# EAGLE board 10_ARDUINO_Front (EAGLE 7.6.0)
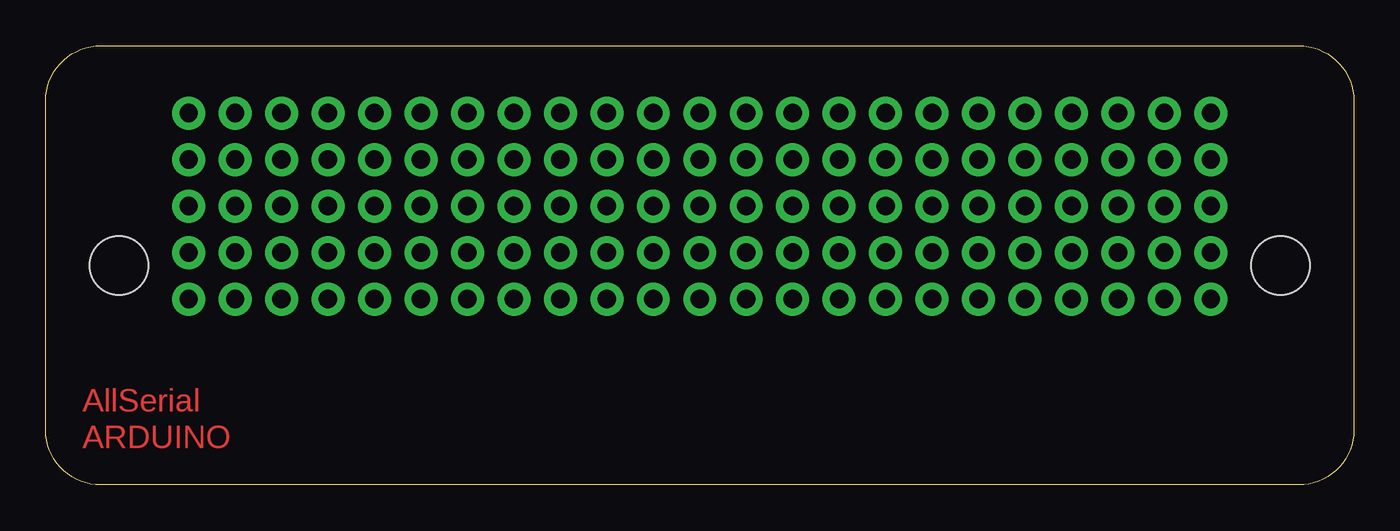
[diagram p0: board, top side]
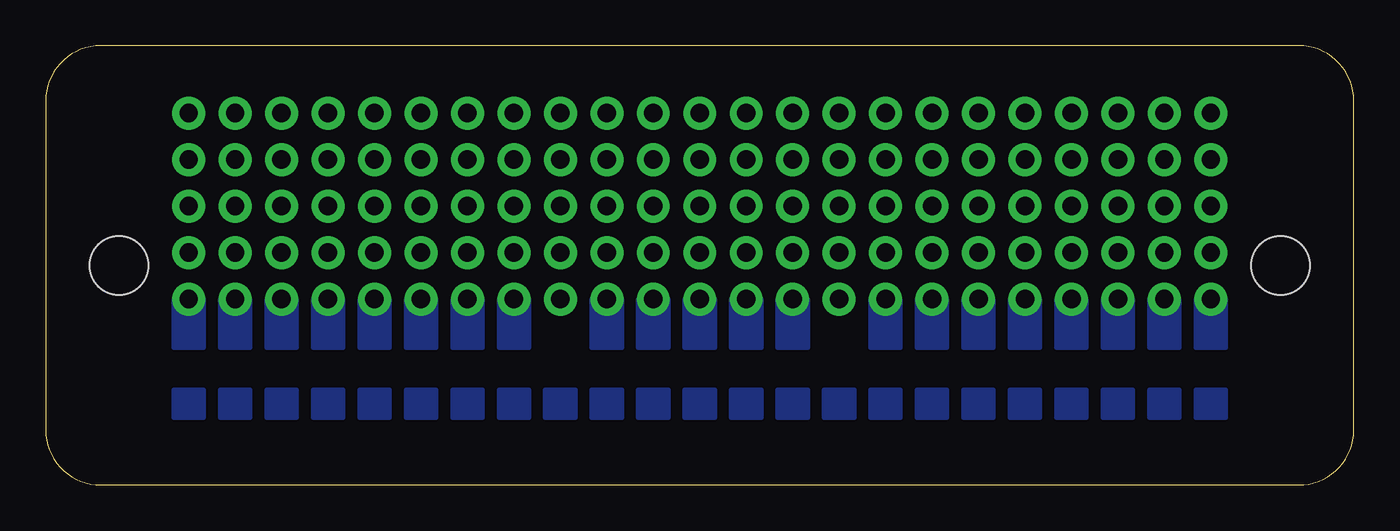
[diagram p1: board, bottom side, seen from below]

Size 71.5 x 24 mm. Coordinates in mm from the lower left corner, seen from the top.
Copper layers (1*16): Top 0.035mm / dielectric 1.5mm / Bottom 0.035mm
Design rules "default *": minimum track width 10mil, minimum drill 0.3mm, track to track 8mil, track to pad 8mil, pad to pad 8mil, via to via 8mil, smd to smd 8mil, copper to edge 0.2mm, drill to drill 8mil, minimum pad ring 10mil, minimum via ring 8mil, stop-mask expansion 4mil, vias tented up to drill 0mil, thermal gap 10mil

## Footprints (pad centres in the part's own frame; a part is rotated, then mirrored left to right if it is on the bottom)
PANEL = hole 3.2: -31.75,12; 31.75,12

## Placement (x,y rotation side)
E$1  [PANEL]  35.75,0 0 top

## Library data of the parts
E$1 = AllSerialv2

## Tracks (layer width: path | path; a pad name or v marks a point on that pad's centre or on a via)
S$1  (via drill 1 pad 1.8)
  other vias: 35.75,10.16
  pour Bottom: 34.93,7.49 34.93,10.16 36.57,10.16 36.57,7.49
S$2  (via drill 1 pad 1.8)
  other vias: 35.75,12.7
S$3  (via drill 1 pad 1.8)
  other vias: 35.75,15.24
S$4  (via drill 1 pad 1.8)
  other vias: 35.75,17.78
S$5  (via drill 1 pad 1.8)
  other vias: 35.75,20.32
S$6  (via drill 1 pad 1.8)
  other vias: 38.29,20.32
S$7  (via drill 1 pad 1.8)
  other vias: 38.29,17.78
S$8  (via drill 1 pad 1.8)
  other vias: 38.29,15.24
S$9  (via drill 1 pad 1.8)
  other vias: 38.29,12.7
S$10
  pour Bottom: 34.93,3.68 34.93,5.21 36.57,5.21 36.57,3.68
S$11  (via drill 1 pad 1.8)
  other vias: 33.21,10.16
  pour Bottom: 32.39,7.49 32.39,10.16 34.03,10.16 34.03,7.49
S$12  (via drill 1 pad 1.8)
  other vias: 33.21,12.7
S$13  (via drill 1 pad 1.8)
  other vias: 33.21,15.24
S$14  (via drill 1 pad 1.8)
  other vias: 33.21,17.78
S$15  (via drill 1 pad 1.8)
  other vias: 33.21,20.32
S$16
  pour Bottom: 32.39,3.68 32.39,5.21 34.03,5.21 34.03,3.68
S$17  (via drill 1 pad 1.8)
  other vias: 43.37,12.7
S$18  (via drill 1 pad 1.8)
  other vias: 43.37,15.24
S$19  (via drill 1 pad 1.8)
  other vias: 43.37,17.78
S$20  (via drill 1 pad 1.8)
  other vias: 43.37,20.32
S$21  (via drill 1 pad 1.8)
  other vias: 45.91,20.32
S$22  (via drill 1 pad 1.8)
  other vias: 45.91,17.78
S$23  (via drill 1 pad 1.8)
  other vias: 45.91,15.24
S$24  (via drill 1 pad 1.8)
  other vias: 45.91,12.7
S$25  (via drill 1 pad 1.8)
  other vias: 45.91,10.16
  pour Bottom: 45.09,7.49 45.09,10.16 46.73,10.16 46.73,7.49
S$26  (via drill 1 pad 1.8)
  other vias: 30.67,10.16
  pour Bottom: 29.85,7.49 29.85,10.16 31.49,10.16 31.49,7.49
S$27  (via drill 1 pad 1.8)
  other vias: 40.83,12.7
S$28  (via drill 1 pad 1.8)
  other vias: 40.83,15.24
S$29  (via drill 1 pad 1.8)
  other vias: 40.83,17.78
S$30  (via drill 1 pad 1.8)
  other vias: 40.83,20.32
S$31  (via drill 1 pad 1.8)
  other vias: 48.45,10.16
  pour Bottom: 47.63,7.49 47.63,10.16 49.27,10.16 49.27,7.49
S$32  (via drill 1 pad 1.8)
  other vias: 50.99,12.7
S$33  (via drill 1 pad 1.8)
  other vias: 50.99,15.24
S$34  (via drill 1 pad 1.8)
  other vias: 50.99,17.78
S$35  (via drill 1 pad 1.8)
  other vias: 50.99,20.32
S$36  (via drill 1 pad 1.8)
  other vias: 53.53,20.32
S$37  (via drill 1 pad 1.8)
  other vias: 53.53,17.78
S$38  (via drill 1 pad 1.8)
  other vias: 53.53,15.24
S$39  (via drill 1 pad 1.8)
  other vias: 53.53,12.7
S$40  (via drill 1 pad 1.8)
  other vias: 50.99,10.16
  pour Bottom: 50.17,7.49 50.17,10.16 51.81,10.16 51.81,7.49
S$41  (via drill 1 pad 1.8)
  other vias: 53.53,10.16
  pour Bottom: 52.71,7.49 52.71,10.16 54.35,10.16 54.35,7.49
S$42  (via drill 1 pad 1.8)
  other vias: 48.45,12.7
S$43  (via drill 1 pad 1.8)
  other vias: 48.45,15.24
S$44  (via drill 1 pad 1.8)
  other vias: 48.45,17.78
S$45  (via drill 1 pad 1.8)
  other vias: 48.45,20.32
S$46
  pour Bottom: 29.85,3.68 29.85,5.21 31.49,5.21 31.49,3.68
S$47  (via drill 1 pad 1.8)
  other vias: 30.67,12.7
S$48  (via drill 1 pad 1.8)
  other vias: 30.67,15.24
S$49  (via drill 1 pad 1.8)
  other vias: 30.67,17.78
S$50  (via drill 1 pad 1.8)
  other vias: 30.67,20.32
S$51  (via drill 1 pad 1.8)
  other vias: 38.29,10.16
  pour Bottom: 37.47,7.49 37.47,10.16 39.11,10.16 39.11,7.49
S$52  (via drill 1 pad 1.8)
  other vias: 28.13,12.7
S$53  (via drill 1 pad 1.8)
  other vias: 28.13,15.24
S$54  (via drill 1 pad 1.8)
  other vias: 28.13,17.78
S$55  (via drill 1 pad 1.8)
  other vias: 28.13,20.32
S$56  (via drill 1 pad 1.8)
  other vias: 17.97,20.32
S$57  (via drill 1 pad 1.8)
  other vias: 17.97,17.78
S$58  (via drill 1 pad 1.8)
  other vias: 17.97,15.24
S$59  (via drill 1 pad 1.8)
  other vias: 17.97,12.7
S$60  (via drill 1 pad 1.8)
  other vias: 17.97,10.16
  pour Bottom: 17.15,7.49 17.15,10.16 18.79,10.16 18.79,7.49
S$61  (via drill 1 pad 1.8)
  other vias: 23.05,12.7
S$62  (via drill 1 pad 1.8)
  other vias: 23.05,15.24
S$63  (via drill 1 pad 1.8)
  other vias: 23.05,17.78
S$64  (via drill 1 pad 1.8)
  other vias: 23.05,20.32
S$65  (via drill 1 pad 1.8)
  other vias: 25.59,20.32
S$66  (via drill 1 pad 1.8)
  other vias: 25.59,17.78
S$67  (via drill 1 pad 1.8)
  other vias: 25.59,15.24
S$68  (via drill 1 pad 1.8)
  other vias: 25.59,12.7
S$69  (via drill 1 pad 1.8)
  other vias: 20.51,12.7
S$70  (via drill 1 pad 1.8)
  other vias: 20.51,15.24
S$71  (via drill 1 pad 1.8)
  other vias: 20.51,17.78
S$72  (via drill 1 pad 1.8)
  other vias: 20.51,20.32
S$73  (via drill 1 pad 1.8)
  other vias: 20.51,10.16
  pour Bottom: 19.69,7.49 19.69,10.16 21.33,10.16 21.33,7.49
S$74  (via drill 1 pad 1.8)
  other vias: 23.05,10.16
  pour Bottom: 22.23,7.49 22.23,10.16 23.87,10.16 23.87,7.49
S$75  (via drill 1 pad 1.8)
  other vias: 25.59,10.16
  pour Bottom: 24.77,7.49 24.77,10.16 26.41,10.16 26.41,7.49
S$76  (via drill 1 pad 1.8)
  other vias: 56.07,20.32
S$77  (via drill 1 pad 1.8)
  other vias: 56.07,17.78
S$78  (via drill 1 pad 1.8)
  other vias: 56.07,15.24
S$79  (via drill 1 pad 1.8)
  other vias: 56.07,12.7
S$80  (via drill 1 pad 1.8)
  other vias: 56.07,10.16
  pour Bottom: 55.25,7.49 55.25,10.16 56.89,10.16 56.89,7.49
S$81  (via drill 1 pad 1.8)
  other vias: 61.15,12.7
S$82  (via drill 1 pad 1.8)
  other vias: 61.15,15.24
S$83  (via drill 1 pad 1.8)
  other vias: 61.15,17.78
S$84  (via drill 1 pad 1.8)
  other vias: 61.15,20.32
S$85  (via drill 1 pad 1.8)
  other vias: 63.69,20.32
S$86  (via drill 1 pad 1.8)
  other vias: 63.69,17.78
S$87  (via drill 1 pad 1.8)
  other vias: 63.69,15.24
S$88  (via drill 1 pad 1.8)
  other vias: 63.69,12.7
S$89  (via drill 1 pad 1.8)
  other vias: 58.61,12.7
S$90  (via drill 1 pad 1.8)
  other vias: 58.61,15.24
S$91  (via drill 1 pad 1.8)
  other vias: 58.61,17.78
S$92  (via drill 1 pad 1.8)
  other vias: 58.61,20.32
S$93  (via drill 1 pad 1.8)
  other vias: 58.61,10.16
  pour Bottom: 57.79,7.49 57.79,10.16 59.43,10.16 59.43,7.49
S$94  (via drill 1 pad 1.8)
  other vias: 61.15,10.16
  pour Bottom: 60.33,7.49 60.33,10.16 61.97,10.16 61.97,7.49
S$95  (via drill 1 pad 1.8)
  other vias: 63.69,10.16
  pour Bottom: 62.87,7.49 62.87,10.16 64.51,10.16 64.51,7.49
S$96  (via drill 1 pad 1.8)
  other vias: 7.81,20.32
S$97  (via drill 1 pad 1.8)
  other vias: 7.81,17.78
S$98  (via drill 1 pad 1.8)
  other vias: 7.81,15.24
S$99  (via drill 1 pad 1.8)
  other vias: 7.81,12.7
S$100  (via drill 1 pad 1.8)
  other vias: 7.81,10.16
  pour Bottom: 6.99,7.49 6.99,10.16 8.63,10.16 8.63,7.49
S$101  (via drill 1 pad 1.8)
  other vias: 12.89,12.7
S$102  (via drill 1 pad 1.8)
  other vias: 12.89,15.24
S$103  (via drill 1 pad 1.8)
  other vias: 12.89,17.78
S$104  (via drill 1 pad 1.8)
  other vias: 12.89,20.32
S$105  (via drill 1 pad 1.8)
  other vias: 15.43,20.32
S$106  (via drill 1 pad 1.8)
  other vias: 15.43,17.78
S$107  (via drill 1 pad 1.8)
  other vias: 15.43,15.24
S$108  (via drill 1 pad 1.8)
  other vias: 15.43,12.7
S$109  (via drill 1 pad 1.8)
  other vias: 10.35,12.7
S$110  (via drill 1 pad 1.8)
  other vias: 10.35,15.24
S$111  (via drill 1 pad 1.8)
  other vias: 10.35,17.78
S$112  (via drill 1 pad 1.8)
  other vias: 10.35,20.32
S$113  (via drill 1 pad 1.8)
  other vias: 10.35,10.16
  pour Bottom: 9.53,7.49 9.53,10.16 11.17,10.16 11.17,7.49
S$114  (via drill 1 pad 1.8)
  other vias: 12.89,10.16
  pour Bottom: 12.07,7.49 12.07,10.16 13.71,10.16 13.71,7.49
S$115  (via drill 1 pad 1.8)
  other vias: 15.43,10.16
  pour Bottom: 14.61,7.49 14.61,10.16 16.25,10.16 16.25,7.49
S$116
  pour Bottom: 24.77,3.68 24.77,5.21 26.41,5.21 26.41,3.68
S$117
  pour Bottom: 22.23,3.68 22.23,5.21 23.87,5.21 23.87,3.68
S$118
  pour Bottom: 19.69,3.68 19.69,5.21 21.33,5.21 21.33,3.68
S$119
  pour Bottom: 17.15,3.68 17.15,5.21 18.79,5.21 18.79,3.68
S$120
  pour Bottom: 14.61,3.68 14.61,5.21 16.25,5.21 16.25,3.68
S$121
  pour Bottom: 12.07,3.68 12.07,5.21 13.71,5.21 13.71,3.68
S$122
  pour Bottom: 9.53,3.68 9.53,5.21 11.17,5.21 11.17,3.68
S$123
  pour Bottom: 6.99,3.68 6.99,5.21 8.63,5.21 8.63,3.68
S$124
  pour Bottom: 47.63,3.68 47.63,5.21 49.27,5.21 49.27,3.68
S$125
  pour Bottom: 45.09,3.68 45.09,5.21 46.73,5.21 46.73,3.68
S$126
  pour Bottom: 52.71,3.68 52.71,5.21 54.35,5.21 54.35,3.68
S$127
  pour Bottom: 50.17,3.68 50.17,5.21 51.81,5.21 51.81,3.68
S$128
  pour Bottom: 57.79,3.68 57.79,5.21 59.43,5.21 59.43,3.68
S$129
  pour Bottom: 55.25,3.68 55.25,5.21 56.89,5.21 56.89,3.68
S$130
  pour Bottom: 62.87,3.68 62.87,5.21 64.51,5.21 64.51,3.68
S$131
  pour Bottom: 60.33,3.68 60.33,5.21 61.97,5.21 61.97,3.68
S$132
  pour Bottom: 37.47,3.68 37.47,5.21 39.11,5.21 39.11,3.68
S$133  (via drill 1 pad 1.8)
  other vias: 40.83,10.16
  pour Bottom: 40.01,7.49 40.01,10.16 41.65,10.16 41.65,7.49
S$134
  pour Bottom: 40.01,3.68 40.01,5.21 41.65,5.21 41.65,3.68
S$135
  pour Bottom: 27.31,3.68 27.31,5.21 28.95,5.21 28.95,3.68
S$136
  pour Bottom: 42.55,3.68 42.55,5.21 44.19,5.21 44.19,3.68
S$137  (via drill 1 pad 1.8)
  other vias: 28.13,10.16
S$138  (via drill 1 pad 1.8)
  other vias: 43.37,10.16

## Text on the board
Top: ARDUINO
tStop: ARDUINO